# Altium PCB PCB_2021-03-31.pcbdoc
Units mm, origin at the board's own origin, x right, y up, seen from the top; angles counter-clockwise.
Board outline 197.42 x 114.07 mm, 2 copper layers (Top Layer, Bottom Layer); 54 components, 38 nets, 117 pads, 5 vias.
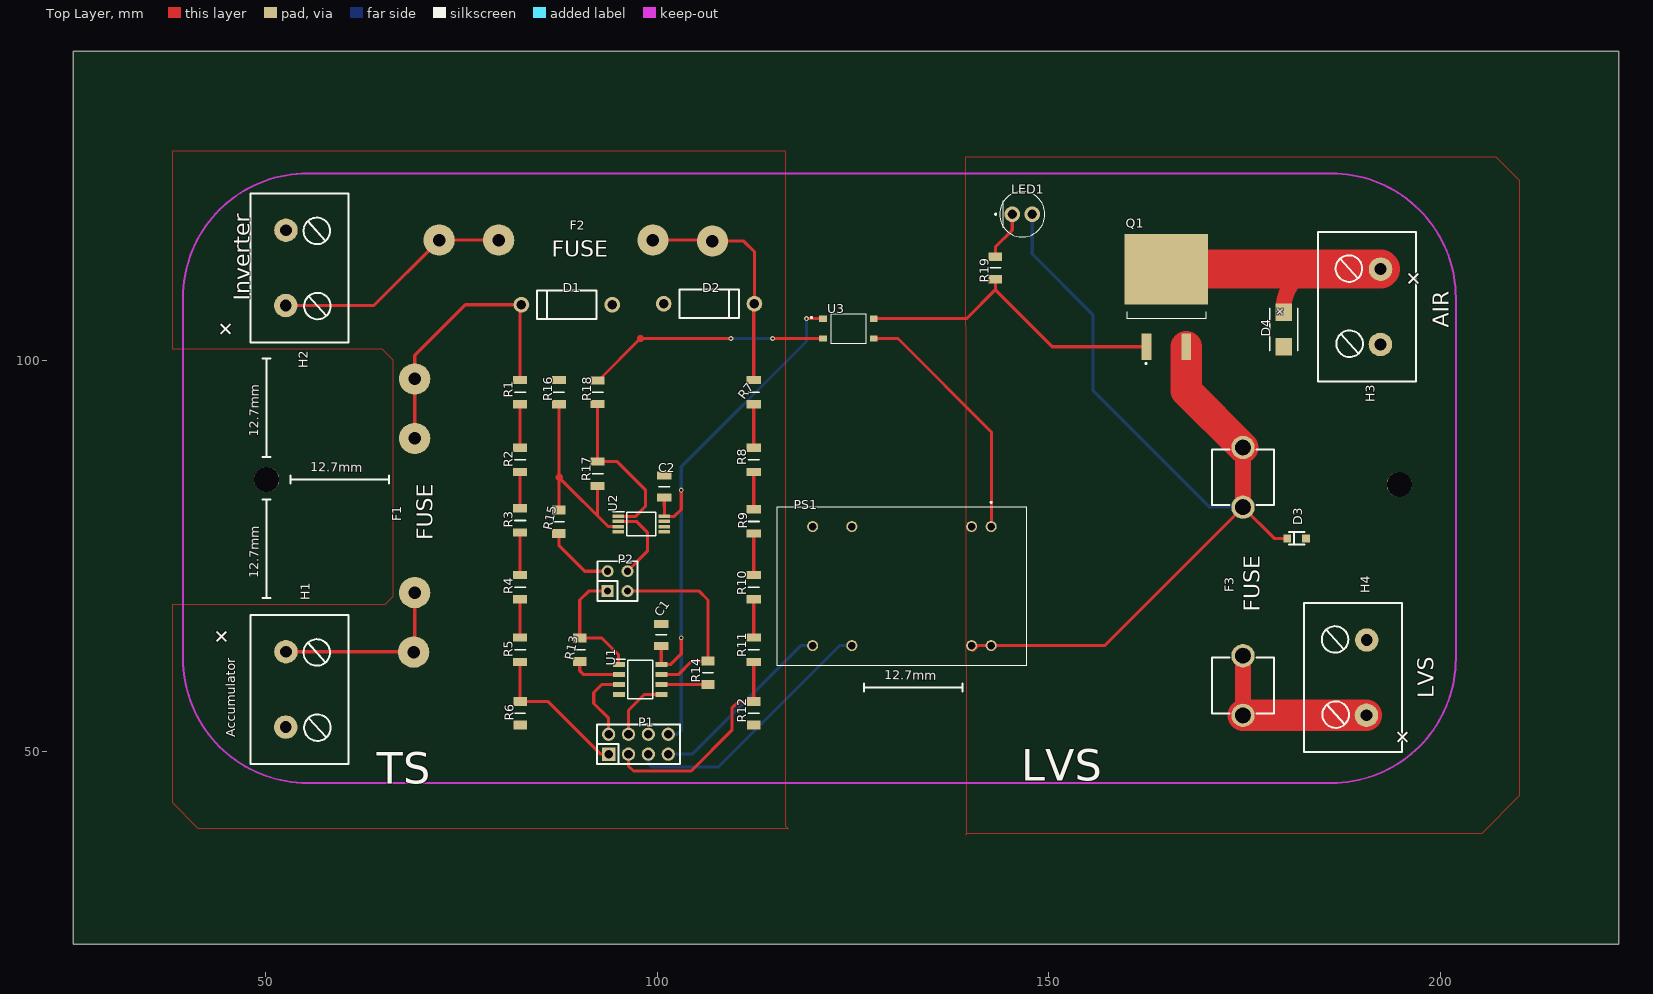
[diagram p0: Top Layer view]
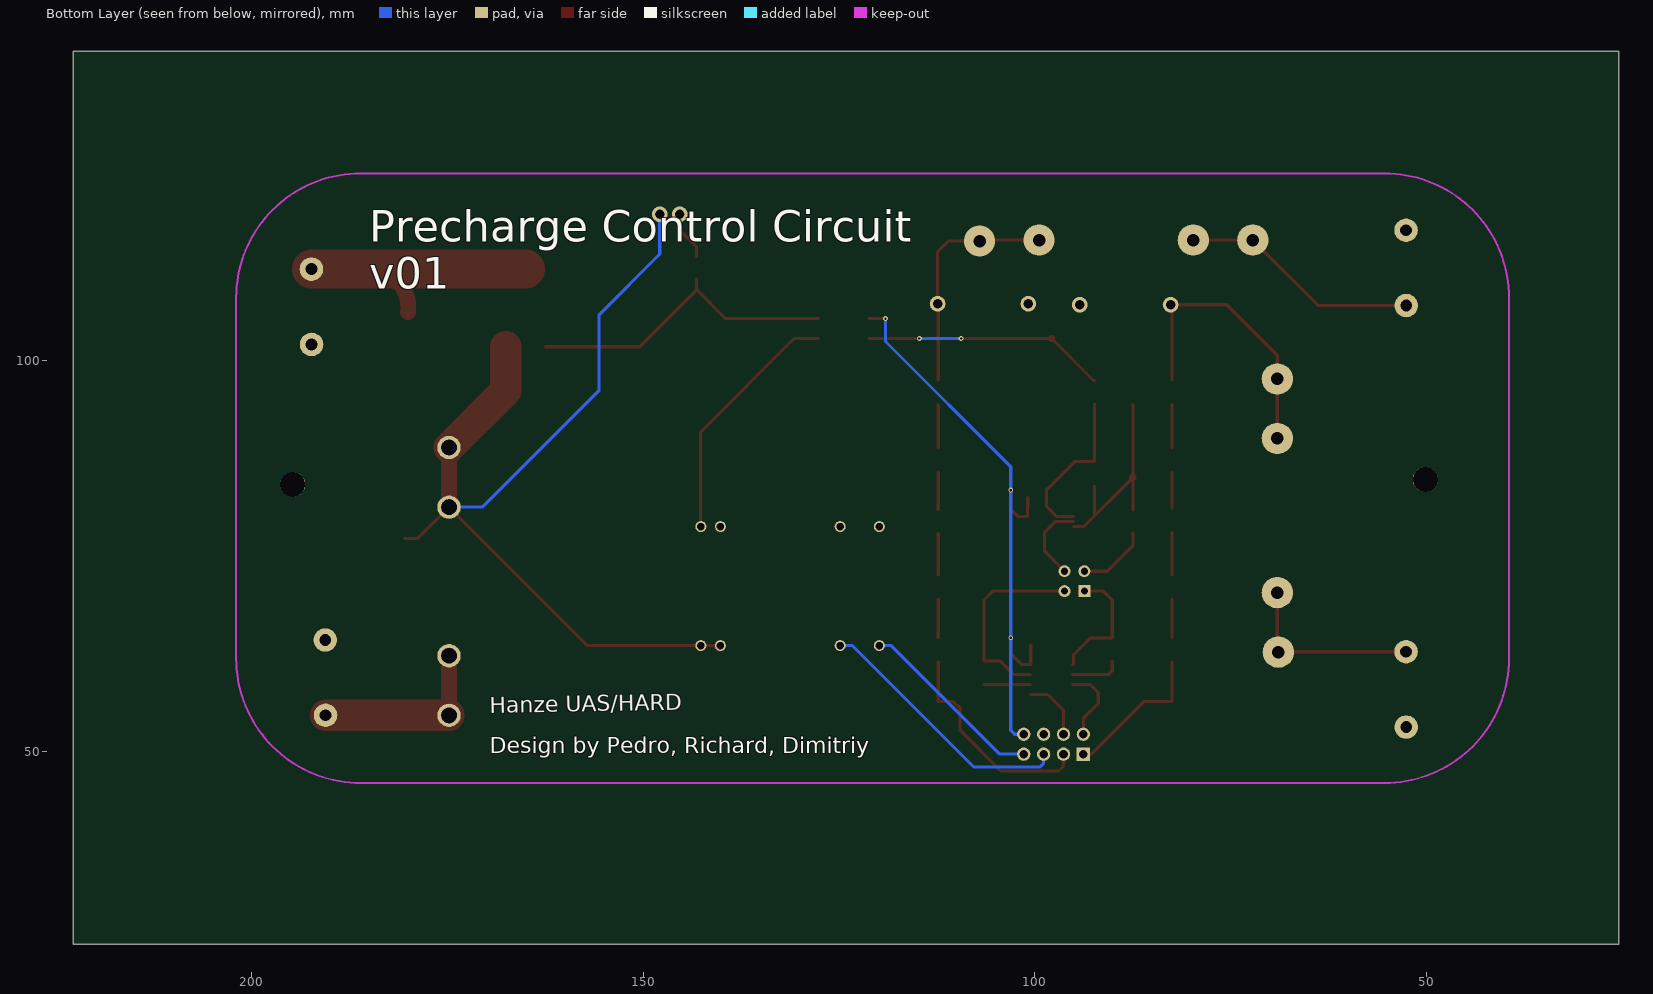
[diagram p1: Bottom Layer view, seen from below]

## Layer stack, top to bottom
Top Layer: signal copper (thickness not stored)
Dielectric: dielectric 0.32, FR-4, Dk 4.8
Bottom Layer: signal copper (thickness not stored)

## Board outline
222.821,25.4 25.4,25.4 25.4,139.465 222.821,139.465

## Components (designator, comment, footprint, x,y, rotation, side; value= is the part's Value field where it differs from the comment)
C1 "100nF" CAPC3216X94N 100.52,64.916 r270 top
C2 "100nF" CAPC3216X94N 100.901,83.839 r90 top
D1 "P6KE600A" DO-15_BD3.1-L6.7-P10.70-D0.9-RD 88.456,107.08 r0 top
D2 "P6KE600A" DO-15_BD3.1-L6.7-P10.70-D0.9-RD 106.617,107.207 r180 top
D3 "SD12-7" SOD-323_L1.8-W1.3-LS2.5-RD 181.673,77.235 r0 top
D4 "TPSMB48A-VR" DIONM5436X244N 180.022,103.905 r270 top
F1 "200mA" "FUSE HOLDER" 69.025,80.156 r90 top
F2 "200mA" "FUSE HOLDER" 89.599,115.335 r180 top
F3 "0.75A" 2XFUSE_CLIP 174.815,58.439 r90 top
H1 "1714971" "PHOENIX CONNECT 1714971 TERMINAL 2 POS" 53.117,52.216 r0 top
H2 "1714971" "PHOENIX CONNECT 1714971 TERMINAL 2 POS" 53.117,106.064 r0 top
H3 "1714971" "PHOENIX CONNECT 1714971 TERMINAL 2 POS" 191.833,112.541 r180 top
H4 "1714971" "PHOENIX CONNECT 1714971 TERMINAL 2 POS" 190.055,65.17 r180 top
LED1 "TLHG6400-CS12Z" TLHG5400 146.621,118.637 r180 top
P1 "Header-Male-2.54_2x4" HDR-TH_8P-P2.54-V-M-R2-C4-S2.54 97.599,50.946 r0 top
P2 "Header-Male-2.54_2x2" HDR-TH_4P-P2.54-V-R2-C2-S2.54 94.932,71.774 r0 top
PS1 "SCWN03A-12" SCWN03A-12 131.255,71.139 r270 top
Q1 "SQM120P10_10M1LGE3" SQM120P10_10M1LGE3 165.036,108.223 r0 top
R1 "1M" RESC3216X70N#1 82.486,95.904 r90 top
R2 "1M" RESC3216X70N#1 82.486,87.268 r90 top
R3 "1M" RESC3216X70N#1 82.486,79.521 r90 top
R4 "1M" RESC3216X70N#1 82.486,71.012 r90 top
R5 "1M" RESC3216X70N#1 82.486,63.011 r90 top
R6 "60.4k" RESC3216X70N#2 82.486,55.391 r90 top
R7 "1M" RESC3216X70N#1 112.331,95.904 r90 top
R8 "1M" RESC3216X70N#1 112.331,87.268 r90 top
R9 "1M" RESC3216X70N#1 112.331,79.394 r90 top
R10 "1M" RESC3216X70N#1 112.331,71.012 r90 top
R11 "1M" RESC3216X70N#1 112.331,63.011 r90 top
R12 "60.4k" RESC3216X70N#2 112.331,55.391 r90 top
R13 "60.4k" RESC3216X70N#2 90.106,63.519 r90 top
R14 "60.4k" RESC3216X70N#2 106.489,59.582 r270 top
R15 "4.7k" RESC3216X70N#2 87.439,78.886 r270 top
R16 "150k" RESC3216X70N#1 87.439,95.904 r270 top
R17 "220k" RESC3216X70N#1 92.392,85.49 r90 top
R18 "1.2k" RESC3216X60N 92.392,95.904 r90 top
R19 "1.2k" RESC3116X70N 143.192,111.779 r90 top
U1 "RC4558DRG3" SOIC127P600X175-8N 97.853,59.201 r0 top
U2 "LM393PWR" SOP65P640X120-8N 97.98,79.076 r0 top
U3 "VOM617A-3T" VOM617A8X001T 123.634,104.032 r0 top
? "" ? 132.461,50.518 r0 top
? "" ? 127.191,64.346 r0 top
? "" ? 126.065,67.473 r0 top
? "" ? 124.855,61.623 r0 top
? "" ? 128.865,67.712 r0 top
? "" ? 132.504,58.537 r0 top
? "" ? 121.44,56.715 r0 top
? "" ? 134.554,57.146 r0 top
? "" ? 124.42,71.766 r0 top
? "" ? 124.855,61.623 r0 top
? "" ? 181.285,58.439 r0 top
? "" ? 181.285,85.035 r0 top
? "" ? 167.303,71.736 r0 top
? "" ? 65.506,67.907 r0 top

## Footprints (in the part's own frame and the unit in brackets; to place one, negate y for a bottom-side part, rotate by r counter-clockwise, add the part's x,y. Pads: shape width x height; smd on the part's side, far side on the other; paste and mask are expansions set on the pad)
2XFUSE_CLIP [mm]
  silkscreen extent -3.55,-3.94 30.15,3.94
CAPC3216X94N [mm]
  rect 1.02x1.82 smd: 1(-1.4,0) 2(1.4,0)
  silkscreen extent 0,-0.7 0,0.7
DIONM5436X244N [mm]
  rect 2.2x2.15 smd: 1(-2.2,0) 2(2.2,0)
  silkscreen extent -2.7,-1.81 2.7,1.81
DO-15_BD3.1-L6.7-P10.70-D0.9-RD [mm]
  round 2 hole 1.2: 1(-5.8,0) 2(5.8,0)
  silkscreen extent -3.8,-1.8 3.8,1.8
"FUSE HOLDER" [mm]
  round 4 hole 1.6: 1(-17.45,0.127) 1(-9.85,0) 2(9.85,0) 2(17.45,0)
HDR-TH_4P-P2.54-V-R2-C2-S2.54 [mil]
  rect 60x60 hole 36: 1(-50,-50)
  round 60 hole 36: 2(-50,50) 3(50,-50) 4(50,50)
  silkscreen extent -100,-100 100,100
HDR-TH_8P-P2.54-V-M-R2-C4-S2.54 [mm]
  rect 1.7x1.7 hole 1.1: 1(-3.81,-1.27)
  round 1.7 hole 1.1: 2(-3.81,1.27) 3(-1.27,-1.27) 4(-1.27,1.27) 5(1.27,-1.27) 6(1.27,1.27) 7(3.81,-1.27) 8(3.81,1.27)
  silkscreen extent -5.31,-2.54 5.31,2.54
"PHOENIX CONNECT 1714971 TERMINAL 2 POS" [mm]
  round 3 hole 1.5: 1(-0.559,0.914) 2(-0.535,10.542)
  silkscreen extent -5.08,-3.8 7.42,15.24
RESC3116X70N [mm]
  rect 1.1x1.7 smd: 1(-1.45,0) 2(1.45,0)
  silkscreen extent 0,-0.67 0,0.67
RESC3216X60N [mm]
  rect 1.05x1.8 smd: 1(-1.5,0) 2(1.5,0)
  silkscreen extent 0,-0.7 0,0.7
RESC3216X70N#1 [mm]
  rect 1.05x1.8 smd: 1(-1.55,0) 2(1.55,0)
  silkscreen extent 0,-0.7 0,0.7
RESC3216X70N#2 [mm]
  rect 1.15x1.7 smd: 1(-2,0) 2(1,0)
  silkscreen extent -0.5,-0.67 -0.5,0.67
SCWN03A-12 [mm]
  round 1.408 hole 0.9 slot 0.9 at 0 deg: 2(-7.6,11.4) 3(-7.6,8.9) 9(-7.6,-6.4) 11(-7.6,-11.4) 14(7.6,-11.4) 16(7.6,-6.4) 22(7.6,8.9) 23(7.6,11.4)
  silkscreen extent -10.8,-15.9 10.15,15.9
SOD-323_L1.8-W1.3-LS2.5-RD [mm]
  rect 1x1 smd: 1(-1.2,0) 2(1.2,0)
  silkscreen extent -1,-0.8 1,0.8
SOIC127P600X175-8N [mm]
  rect 1.528x0.65 smd: 1(-2.711,1.905) 2(-2.711,0.635) 3(-2.711,-0.635) 4(-2.711,-1.905) 5(2.711,-1.905) 6(2.711,-0.635) 7(2.711,0.635) 8(2.711,1.905)
  silkscreen extent -3.47,-2.45 1.6,2.58
SOP65P640X120-8N [mm]
  rect 1.475x0.45 smd: 1(-2.938,0.975) 2(-2.938,0.325) 3(-2.938,-0.325) 4(-2.938,-0.975) 5(2.938,-0.975) 6(2.938,-0.325) 7(2.938,0.325) 8(2.938,0.975)
  silkscreen extent -3.67,-1.5 1.85,1.55
SQM120P10_10M1LGE3 [mil]
  rect 49.49x135 smd: 1(-99.41,-256.14) 3(99.41,-256.14)
  rect 420x355 smd: 2(0,133.86)
  silkscreen extent -200,-344 200,-81
TLHG5400 [mm]
  round 2 hole 1.12: 1(1.27,0) 2(-1.27,0)
  silkscreen extent -2.9,-2.9 3.5,2.9
VOM617A8X001T [mm]
  rect 1x0.8 smd: 1(-2.475,1.27) 2(-2.475,-1.27) 3(4.025,-1.27) 4(4.025,1.27)
  silkscreen extent -4.02,-1.93 2.98,1.93
? [mm]

## Free pads (board coordinates)
  round 2.98 hole 1.98 slot 1.98 at 90 deg: 1(174.815,54.629) 1(174.815,62.249) 2(174.815,81.223) 2(174.815,88.843)
  round 3.2 hole 3.2 unplated: ""(50.116,84.755) ""(194.781,84.12)

## Via types
v1: diameter 0.62, hole 0.305, Top Layer to Bottom Layer, 5 vias

## Nets (pads, with @x,y where several pads share a name; then routed paths per layer and width w, separated by ;. In a path a pad name is that pad's centre, name@x,y a point inside that pad or via, vN(x,y) a via of type N, cw(c..) or ccw(c..) an arc to the next point about the centre after c; other vN are vias at no path point)
+12V: C1.2 C2.1 P1.8 U1.8 U2.8 U3.1 | length 78.1
  Top Layer w0.4: C1.2 100.52,61.15 U1.8 ; U1.8 101.663,61.106 103.06,62.503 v1(103.06,64.535) ; C2.1@100.901,82.44 100.919,80.052 102.194,80.052 103.06,80.918 v1@103.06,83.395 ; v1(119.062,105.302) U3.1
  Bottom Layer w0.4: P1.8 102.552,52.216 103.06,52.724 v1(103.06,64.535) v1(103.06,83.394) 103.06,86.379 119.062,102.381 v1(119.062,105.302)
+12V:: P1.7 PS1.14 | length 24.2
  Bottom Layer w0.4: P1.7 104.457,49.676 118.321,63.54 PS1.14
D2_1: D2.1 F2.1 R7.2 | length 30
  Top Layer w0.4: F2.1@99.448,115.335 106.922,115.335 107.049,115.208 111.061,115.208 112.417,113.853 D2.1 112.331,107.122 R7.2
GND: C1.1 C2.2 D1.2 D2.2 H1.1 P1.6 R6.1 R12.1 R16.1 U1.4 U2.4
GND1: D3.2 D4.2 H3.2 H4.1 PS1.2 PS1.3 U3.3 | length 33
  Top Layer w0.4: U3.3 130.746,102.762 142.684,90.824 142.684,78.769 PS1.2
  Bottom Layer w0.4: H4.1@190.208,63.494 190.614,63.9 H4.1
GND:: P1.5 PS1.16 | length 33.8
  Bottom Layer w0.4: P1.5 98.87,48.533 99.377,48.025 107.759,48.025 123.274,63.54 PS1.16
H1_2: F1.1 H1.2 | length 23.8
  Top Layer w0.4: H1.2 68.846,62.758 F1.1@68.897,62.706 ; F1.1@69.025,62.757 F1.1@69.025,70.25
H2_1: F2.2 H2.1 | length 30.2
  Top Layer w0.4: H2.1@52.972,106.979 63.792,106.979 72.149,115.335 F2.2@79.748,115.335
H3_1: D4.1 H3.1 Q1.2 | length 36.4
  Top Layer w2: Q1.2 cw(c165.04,111.624) Q1.2@165.04,111.627 ; D4.1@180.061,106.11 cw(c184.926,106.723) 185.634,111.576
  Top Layer w5: Q1.2@165.04,111.627 H3.1
H4_2: H4.2 pad.1 | length 23.4
  Top Layer w2: pad.1@174.815,54.629 pad.1@174.815,62.249
  Top Layer w4: pad.1@174.816,54.629 H4.2
R1_1: R1.1 R2.2 | length 5.5
  Top Layer w0.4: R2.2 R1.1
R1_2: D1.1 F1.2 R1.2 | length 36.6
  Top Layer w0.4: F1.2@69.025,90.007 F1.2@69.025,97.606 ; F1.2@69.025,97.607 69.025,100.603 75.501,107.08 D1.1 ; R1.2 82.486,106.912 D1.1
R2_1: R2.1 R3.2 | length 4.6
  Top Layer w0.4: R3.2 R2.1
R3_1: R3.1 R4.2 | length 5.4
  Top Layer w0.4: R4.2 R3.1
R4_1: R4.1 R5.2 | length 4.9
  Top Layer w0.4: R5.2 R4.1
R8_2: R7.1 R8.2 | length 5.5
  Top Layer w0.4: R8.2 R7.1
R9_2: R8.1 R9.2 | length 4.8
  Top Layer w0.4: R9.2 R8.1
R10_2: R9.1 R10.2 | length 5.3
  Top Layer w0.4: R10.2 R9.1
R11_2: R10.1 R11.2 | length 4.9
  Top Layer w0.4: R11.2 R10.1
R13_1: R13.1 U1.2 | length 6.4
  Top Layer w0.4: R13.1 90.106,60.344 90.614,59.836 U1.2
R18_2: R18.2 U3.2 | length 32.6
  Top Layer w0.4: R18.2 92.496,97.405 97.853,102.762 v1(109.41,102.762) ; v1(114.745,102.762) U3.2 ; 98.108,102.762 ccw(c97.853,102.762) 98.108,102.762
  Bottom Layer w0.4: v1(109.41,102.762) v1(114.745,102.762)
R19_1: Q1.1 R19.1 U3.4 | length 40.7
  Top Layer w0.4: U3.4 132.27,105.302 139.51,105.302 143.192,108.985 ; R19.1 143.192,108.985 ; Q1.1 150.46,101.718 143.192,108.985
R19_2: LED1.1 R19.2 | length 6.3
  Top Layer w0.4: R19.2 143.192,114.446 145.351,116.605 LED1.1
S$3560: 
S$3562: 
S$7581: 
U1_6: R14.2 U1.6 | length 5.9
  Top Layer w0.4: U1.6 R14.2
U2_3: R15.1 R16.2 R17.1 U2.3 | length 29
  Top Layer w0.4: R15.1 R16.2 ; 87.566,84.934 93.734,78.751 U2.3 ; 92.382,80.108 92.392,80.118 R17.1 ; 87.749,85.035 ccw(c87.484,85.035) 87.749,85.035
VCC: D3.1 LED1.2 pad.2 PS1.22 PS1.23 Q1.3 | length 124
  Top Layer w0.4: PS1.22@140.281,62.905 140.916,63.54 PS1.23 157.132,63.54 174.815,81.224 178.804,77.235 D3.1
  Top Layer w2: pad.2@174.815,81.224 174.815,83.237 pad.2@174.815,88.844
  Top Layer w4: Q1.3 167.562,96.097 pad.2@174.815,88.844
  Bottom Layer w0.4: LED1.2 147.892,113.557 155.638,105.81 155.638,96.158 170.574,81.223 pad.2@174.815,81.223
VIN-BAT: P1.2 U1.3 | length 9.8
  Top Layer w0.4: P1.2 93.789,54.248 91.885,56.153 91.885,57.55 92.9,58.566 U1.3
VIN-BAT:: P1.1 R5.1 R6.2 | length 19.2
  Top Layer w0.4: R5.1 R6.2 86.059,56.391 92.773,49.676 P1.1
VIN-INV: P1.4 U1.5 | length 8.1
  Top Layer w0.4: P1.4 96.329,55.264 98.361,57.296 U1.5
VIN-INV:: P1.3 R11.1 R12.2 | length 28.2
  Top Layer w0.4: P1.3 96.329,48.152 96.965,47.517 104.331,47.517 109.537,52.724 109.537,55.518 110.41,56.391 R12.2 R11.1
VOUT-BAT: P2.2 R15.2 | length 9.1
  Top Layer w0.4: R15.2 87.439,76.346 90.742,73.044 P2.2
VOUT-BAT:: P2.1 R13.2 U1.1 | length 16.1
  Top Layer w0.4: P2.1 91.249,70.504 90.106,69.361 90.106,64.52 92.916,64.52 95.059,62.376 95.059,61.106 U1.1
VOUT-COMP: R17.2 R18.1 U2.1 | length 21.1
  Top Layer w0.4: R18.1 R17.2 94.907,87.04 98.489,83.458 98.489,81.299 97.241,80.052 U2.1
VOUT-INV: P2.4 U2.2 | length 10.3
  Top Layer w0.4: U2.2 97.338,79.402 98.742,77.997 98.742,75.584 P2.4
VOUT-INV:: P2.3 R14.1 U1.7 | length 25.2
  Top Layer w0.4: P2.3 105.346,70.504 106.489,69.361 R14.1 104.425,61.582 102.679,59.836 U1.7
pads on no net: H2.2 PS1.9 PS1.11 U2.5 U2.6 U2.7

## Polygon pours and split planes (outlines as drawn)
GND on Top Layer (solid): 38.1,68.853 65.278,68.853 66.294,69.869 66.294,99.968 64.897,101.365 38.735,101.365 38.1,101.365 38.1,125.749 38.1,126.638 38.1,126.765 38.354,126.765 115.57,126.765 116.332,126.765 116.332,125.495 116.332,40.532 116.713,40.151 41.402,40.151 38.1,43.453 38.1,68.218 38.1,68.853
GND1 on Top Layer (solid): 139.382,126.003 207.073,126.003 210.121,122.955 210.121,44.342 205.296,39.516 139.51,39.516 139.382,39.389 139.51,39.516

## Keep-outs
Keep-Out Layer:
  lines w0.254: 39.433,61.878 ccw(c55.319,61.878) 55.319,45.993 ; 39.433,107.969 cw(c55.319,107.969) 55.319,123.854 ; 186.108,45.993 ccw(c186.108,61.878) 201.993,61.878 ; 186.108,123.854 cw(c186.108,107.969) 201.993,107.969

## Silkscreen, mask and mechanical layers (free items; w line width, h text height)
Top Overlay:
  lines w0.254 net S$3560: 50.102,69.742 50.102,81.68 ; 50.102,87.776 50.102,99.714 ; 53.276,84.728 65.215,84.728 ; 126.555,58.185 138.493,58.185
  lines w0.254 net S$3562: 49.593,69.615 50.102,69.615 50.609,69.615 ; 49.593,82.188 50.609,82.188 ; 49.593,87.649 50.102,87.649 50.609,87.649 ; 49.593,100.222 50.609,100.222 ; 50.102,81.68 50.102,82.188 ; 50.102,99.714 50.102,100.222 ; 53.149,84.22 53.149,84.728 53.149,85.236 ; 65.215,84.728 65.722,84.728 ; 65.722,84.22 65.722,85.236 ; 126.428,57.677 126.428,58.185 126.428,58.693 ; 138.493,58.185 139.001,58.185 ; 139.001,57.677 139.001,58.693
  text "+" at 196.83,111.863 h2.03 r225
  text "Inverter" at 47.942,107.588 h2.03 r90
  text "+" at 179.387,107.334 h2.03 r223
  text "AIR" at 201.105,104.159 h2.03 r90
  text "+" at 46.375,103.735 h2.03 r135
  text "12.7mm" at 49.466,90.189 h2.03 r89
  text "12.7mm" at 55.689,85.363 h2.03 r359
  text "12.7mm" at 49.466,72.155 h2.03 r89
  text "FUSE" at 176.975,67.837 h2.03 r90
  text "+" at 44.557,66.143 h2.03 r225
  text "12.7mm" at 128.969,58.82 h2.03 r359
  text "LVS" at 199.2,56.788 h2.03 r90
  text "+" at 195.433,53.316 h2.03 r225
  text "Accumulator" at 46.545,51.835 h2.03 r90
  text "LVS" at 146.494,46.279 h4
  text "TS" at 64.198,45.898 h4
Bottom Overlay:
  text "Precharge Control Circuit / v01" at 184.975,109.144 h4
  text "Hanze UAS/HARD" at 169.591,54.884 h2.03 r359
  text "Design by Pedro, Richard, Dimitriy" at 169.608,49.803 h2.03
Top Solder:
  circle w0.4 net S$7581: c87.484,85.037 r0.18
  circle w0.4 net S$7581: c97.853,102.762 r0.18

## Text inside footprints (layer, text, board x,y; h text height)
F1: Top Overlay "FUSE" at 71.31,76.981 h2.03 r90
F2: Top Overlay "FUSE" at 86.55,113.176 h2.03